# Altium PCB rasp_infrad.PcbDoc
Units mm, origin at the board's own origin, x right, y up, seen from the top; angles counter-clockwise.
Board outline 152.4 x 101.6 mm, 2 copper layers (Top Layer, Bottom Layer); 17 components, 15 nets, 53 pads, 6 vias.
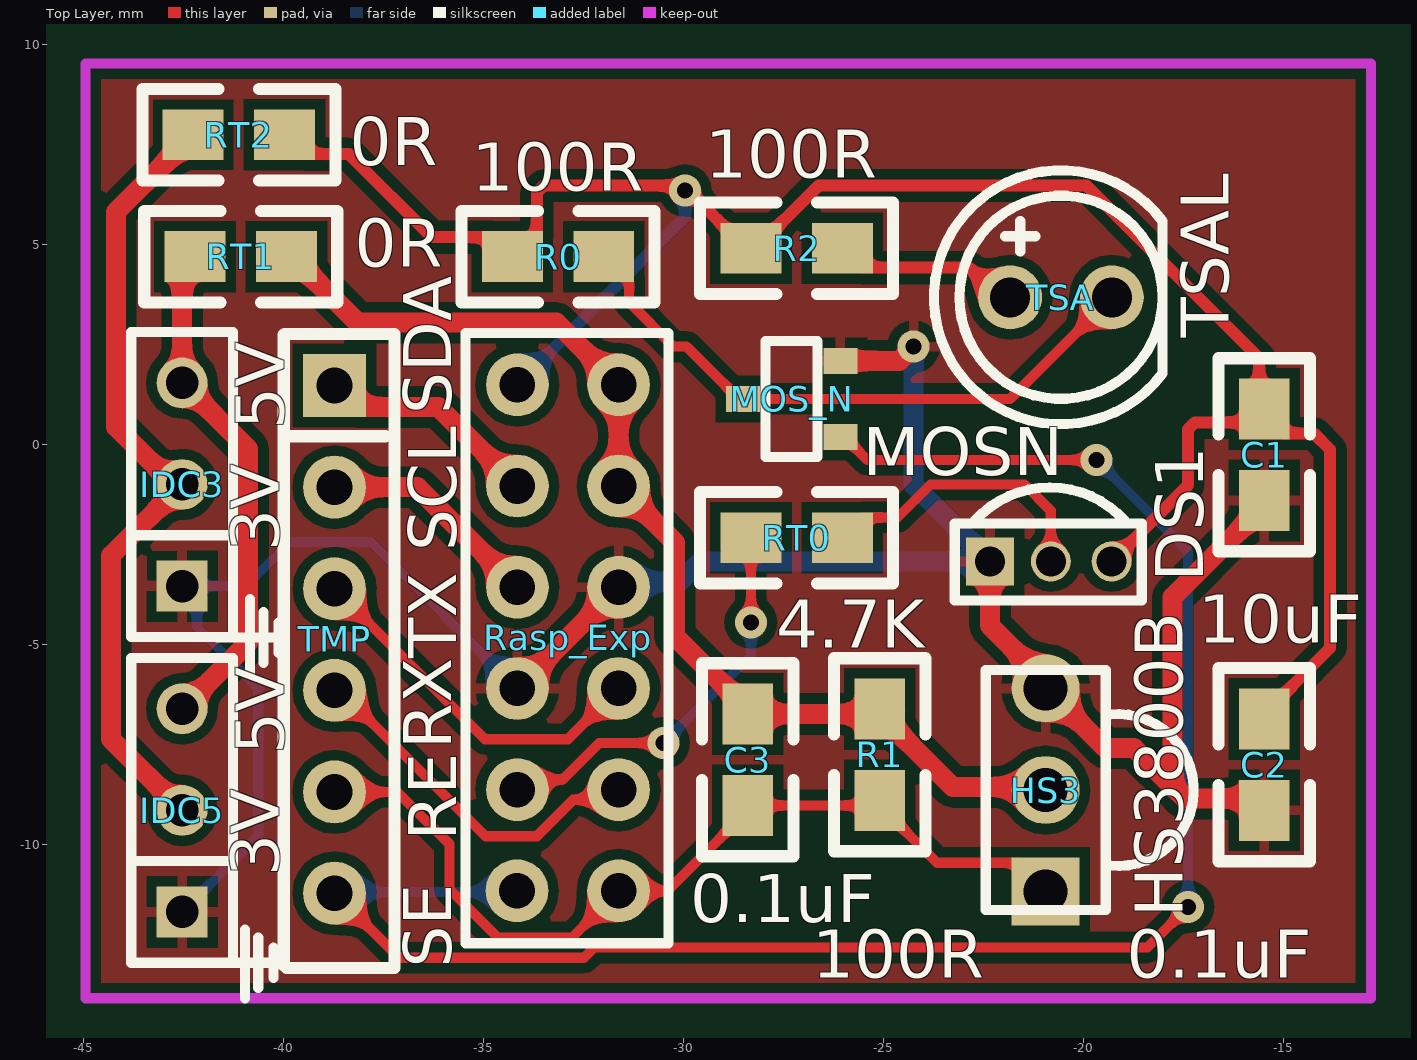
[diagram p0: Top Layer view]
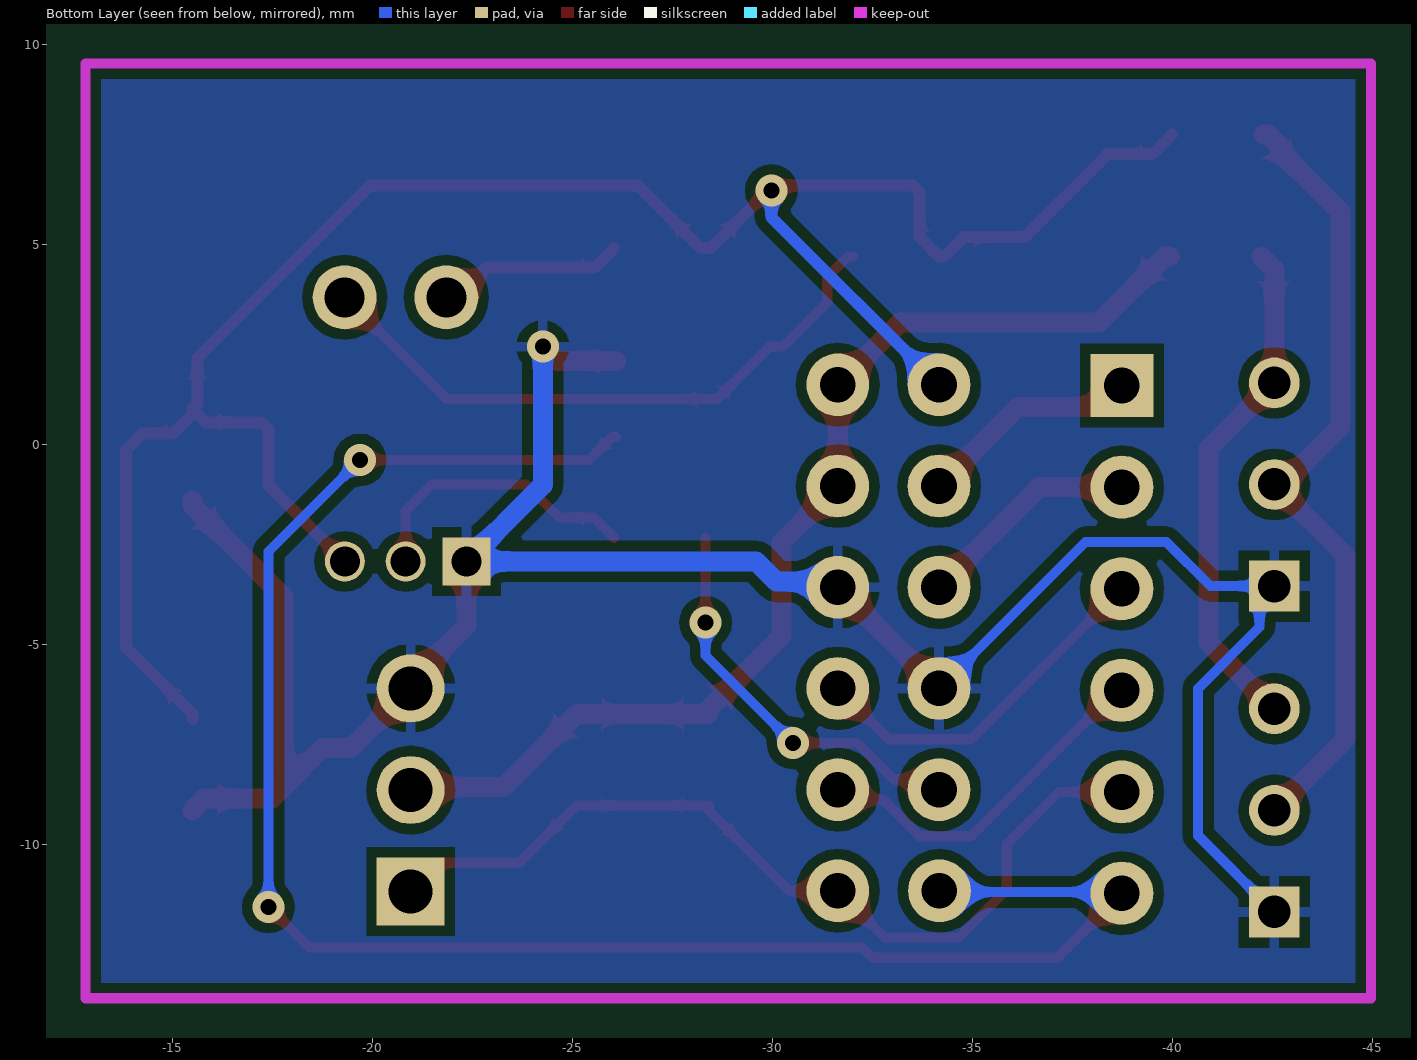
[diagram p1: Bottom Layer view, seen from below]

## Layer stack, top to bottom
Top Solder: solder mask 0.0102, Solder Resist, Dk 3.5
Top Layer: signal copper 0.0356
Dielectric1: dielectric 0.32, FR-4, Dk 4.8
Bottom Layer: signal copper 0.0356
Bottom Solder: solder mask 0.0102, Solder Resist, Dk 3.5

## Board outline
-85.354,-63.968 67.046,-63.968 67.046,37.632 -85.354,37.632

## Design rules (kind name [scope] priority, off if disabled: settings)
Clearance [All] p1: gap=0.254 ignorepadtopadclearanceinfootprint=FALSE except(0: Arc-Hole Track-Hole SMDPad-Hole THPad-Hole Via-Hole Fill-Hole Poly-Hole Region-Hole Text-Hole)
FabricationTestPointUsage TestPointUsage [All] p1: valid=0 allowmultiple=FALSE
FabricationTestpoint Testpoint [All] p1: side=3 testpointundercomponent=TRUE minsize=1.016 maxsize=2.54 preferedsize=1.524 minholesize=0 maxholesize=1.016 preferedholesize=0.813 testpointgrid=0.025 allowsidetop=TRUE allowsidebottom=TRUE usegrid=TRUE gridtolerance=0
HoleToHoleClearance [All] p1 off: gap=0.254 allowstackedmicrovias=TRUE
LayerPairs [All] p1 off: enforce=TRUE
MinimumSolderMaskSliver [All] p1 off: minsoldermaskwidth=0.254
PolygonConnect [All] p1: connectstyle=Relief reliefconductorwidth=0.254 reliefentries=4 polygonreliefangle="90 Angle" airgapwidth=0.254
RoutingVias [All] p1: holewidth=0.711 width=1.27 viastyle="Through Hole" minholewidth=0.711 minwidth=1.27 maxholewidth=0.711 maxwidth=1.27
SilkToSilkClearance [All] p1 off: silktosilkclearance=0.254
SilkToSolderMaskClearance SilkscreenOverComponentPads [IsPad] p1 off: minsilkscreentomaskgap=0.254 clearancetoexposedcopper=TRUE
SolderMaskExpansion [All] p1: expansion=0.102
Width [All] p1: maxlimit=0.5 minlimit=0.254 preferedwidth=0.254
23 further rules are at their usual default settings.

## Classes and differential pairs
component class rasp_infrad: C1 C2 C3 HS3 IDC3 MOS_N R0 R1 R2 Rasp_Exp RT0 RT1 RT2 TMP TSA

## Components (designator, comment, footprint, x,y, rotation, side; value= is the part's Value field where it differs from the comment)
C1 "10uF" 0805 -15.705,-0.386 r90 top
C2 "0.1uF" 0805 -15.705,-8.133 r90 top
C3 "0.1uF" 0805 -28.194,-7.747 r270 top
DS1 "DS1" DS18B20 -20.528,-2.796 r0 top
HS3 "HS3800B" HS0038B -20.663,-7.637 r270 top
IDC3 "IDC3" IDC3 -42.545,-0.997 r90 top
IDC5 "IDC5" IDC3 -42.545,-9.144 r90 top (schematic designator IDC3)
MOS_N "MOSN" MOSN -27.305,1.143 r90 top
R0 "100R" 0805 -33.279,4.91 r0 top
R1 "100R" 0805 -24.892,-7.62 r270 top
R2 "100R" 0805 -27.051,4.699 r180 top
Rasp_Exp "Rasp_Exp" Rasp_Exp -32.493,-3.066 r0 top
RT0 "4.7K" 0805 -27.051,-2.54 r180 top
RT1 "0R" 0805 -41.21,4.91 r0 top
RT2 "0R" 0805 -41.258,7.958 r0 top
TMP "IDC6" IDC6 -38.621,-4.784 r90 top
TSA "TSAL" TSAL6200 -20.421,1.74 r0 top

## Footprints (in the part's own frame and the unit in brackets; to place one, negate y for a bottom-side part, rotate by r counter-clockwise, add the part's x,y. Pads: shape width x height; smd on the part's side, far side on the other; paste and mask are expansions set on the pad)
0805 [mil]
  rect 60x50 smd: 1(50.2,-8.31) 2(-39.8,-8.31)
  silkscreen extent -90,-53 100,37
DS18B20 [mm]
  rect 1.2x1.2 hole 0.75: 1(-1.82,-0.125)
  round 1 hole 0.75: 2(-0.3,-0.125) 3(1.22,-0.125)
  silkscreen extent -2.7,-1.1 1.97,1.73
HS0038B [mm]
  rect 1.7x1.7 hole 1.1: 1(3.539,-0.292)
  round 1.7 hole 1.1: 2(0.999,-0.292) 3(-1.541,-0.292)
  silkscreen extent -2,-1.79 4,3.4
IDC3 [mil]
  rect 50x50 hole 32: 1(-100,0)
  round 50 hole 32: 2(0,0) 3(100,0)
  silkscreen extent -150,-50 150,50
IDC6 [mil]
  rect 62x62 hole 35.09: 1(246.5,4.49)
  round 62 hole 35.09: 2(146.5,4.49) 3(46.5,4.49) 4(-53.5,4.49) 5(-153.5,4.49) 6(-253.11,4.49)
  silkscreen extent -327,-55 297,54
MOSN [mm]
  rect 0.65x0.85 smd: 1(-0.95,-1.215) 2(0.95,-1.215) 3(0,1.221)
  silkscreen extent -1.45,-0.64 1.45,0.66
Rasp_Exp [mm]
  round 1.57 hole 0.89: 1(-1.67,4.56) 2(-1.67,2.03) 3(-1.67,-0.5) 4(-1.67,-3.03) 5(-1.67,-5.56) 6(-1.68,-8.09) 7(0.86,-8.09) 8(0.86,-5.56) 9(0.86,-3.03) 10(0.86,-0.5) 11(0.86,2.03) 12(0.86,4.56)
  silkscreen extent -2.97,-9.4 2.11,5.86
TSAL6200 [mm]
  round 1.6 hole 1: 1(-1.423,1.943) 2(1.117,1.943)
  silkscreen extent -3.32,-1.23 2.39,5.11

## Part data
C1 C2 C3: library part 普通电容, "Capacitor"
DS1: library part DS18B20, "数字温度传感器"
HS3: "红外接收管"
IDC3 IDC5: library part 三脚引线孔
MOS_N: library part MOS_N
R0 R1 R2 RT0 RT1 RT2: library part RES
TMP: library part 六脚引线孔
TSA: library part TSAL6200

## Via types
v1: diameter 0.8, hole 0.4, Top Layer to Bottom Layer, 6 vias

## Nets (pads, with @x,y where several pads share a name; then routed paths per layer and width w, separated by ;. In a path a pad name is that pad's centre, name@x,y a point inside that pad or via, vN(x,y) a via of type N, cw(c..) or ccw(c..) an arc to the next point about the centre after c; other vN are vias at no path point)
3.3V: C1.1 C2.1 DS1.3 R0.2 R2.1 Rasp_Exp.1 RT2.1 | length 53.8
  Top Layer w0.3: RT2.1 -39.498,7.262 -38.377,7.262 -36.299,5.184 -34.775,5.184 R0.2 -34.163,4.699 -33.678,5.184 -33.678,6.301 -33.502,6.477 -30.02,6.477 -28.453,4.91 R2.1 -28.199,4.91 -26.632,6.477 -19.939,6.477 -15.621,2.159 -15.621,1.016 C1.1 ; DS1.3 -17.399,-1.012 -17.399,0.381 -17.223,0.557 -15.826,0.557 C1.1 ; C2.1 -15.494,-6.731 -13.843,-5.08 -13.843,-0.127 -14.247,0.277 -15.009,0.277 -15.494,0.762 C1.1
  Bottom Layer w0.3: Rasp_Exp.1 -29.972,5.685 v1(-29.972,6.35)
5V: C3.2 HS3.2 R1.2 Rasp_Exp.11 Rasp_Exp.12 RT1.1 | length 27.4
  Top Layer w0.5: RT1.1 -39.808,4.699 -38.157,3.048 -33.187,3.048 Rasp_Exp.12 Rasp_Exp.11 -30.226,-2.443 -30.226,-4.788 -28.405,-6.609 C3.2 -25.103,-6.736 -23.279,-8.56 -21.031,-8.56 HS3.2
DATA: Rasp_Exp.5 RT0.1 | length 10.2
  Top Layer w0.254: Rasp_Exp.5 -33.911,-8.374 -33.03,-8.374 -32.116,-7.46 v1(-30.513,-7.46) ; v1(-28.326,-4.445) RT0.1 RT0.1@-28.321,-2.334
  Bottom Layer w0.254: v1(-30.513,-7.46) -28.326,-5.273 v1(-28.326,-4.445)
GND: C1.2 C2.2 DS1.1 HS3.3 IDC3.1 IDC5.1 MOS_N.2 Rasp_Exp.4 Rasp_Exp.10 | length 59.9
  Top Layer w0.5: Rasp_Exp.4 Rasp_Exp.10 ; MOS_N.2 -24.613,2.093 v1(-24.257,2.449) ; DS1.1 -22.348,-4.526 -20.955,-5.919 HS3.3 -19.464,-7.587 -18.749,-7.587 -17.78,-8.556 ; C2.2 -15.789,-8.849 -17.487,-8.849 -17.78,-8.556 ; C1.2 -15.494,-1.524 -17.78,-3.81 -17.78,-8.556
  Bottom Layer w0.254: IDC5.1 -40.64,-9.779 -40.64,-6.096 -42.174,-4.562 -42.174,-3.908 IDC3.1 -40.949,-3.537 -39.847,-2.435 -37.824,-2.435 Rasp_Exp.4
  Bottom Layer w0.5: Rasp_Exp.10 -31.495,-3.428 -30.098,-3.428 -29.591,-2.921 DS1.1 -24.257,-1.012 v1(-24.257,2.449)
NetDS1_2: DS1.2 RT0.2 | length 7.3
  Top Layer w0.254: RT0.2 -25.532,-1.821 -24.661,-1.821 -23.837,-0.997 -21.482,-0.997 -20.828,-1.651 DS1.2
NetIDC3_2: IDC3.2 IDC5.2 RT2.2 | length 20
  Top Layer w0.5: IDC5.2 -44.323,-7.366 -44.323,-2.775 IDC3.2 -42.753,-0.997 -44.196,0.446 -44.196,5.82 -42.781,7.235 -42.781,7.362 -42.396,7.747 RT2.2
NetIDC3_3: IDC3.3 IDC5.3 RT1.2 | length 12.8
  Top Layer w0.5: IDC5.3 -40.894,-4.953 -40.894,-0.108 IDC3.3 -42.545,4.375 RT1.2
NetR2_2: R2.2 TSA.1 | length 4.7
  Top Layer w0.3: R2.2 -25.555,4.425 -22.87,4.425 -22.128,3.683 TSA.1
RECV: C3.1 HS3.1 R1.1 Rasp_Exp.7 TMP.5 | length 22.3
  Top Layer w0.254: TMP.5 -37.164,-8.683 -35.857,-9.99 -35.857,-11.121 -34.656,-12.322 -32.799,-12.322 Rasp_Exp.7 -30.412,-11.156 -28.405,-9.149 C3.1 -25.103,-9.022 -23.672,-10.453 -21.678,-10.453 HS3.1
RX: Rasp_Exp.8 TMP.4 | length 9.1
  Top Layer w0.254: TMP.4 -38.609,-6.143 -34.96,-9.792 -33.68,-9.792 -32.766,-8.878 -31.885,-8.878 Rasp_Exp.8
SCL: Rasp_Exp.3 TMP.2 | length 5.6
  Top Layer w0.5: TMP.2 -36.666,-1.063 Rasp_Exp.3
SDA: Rasp_Exp.2 TMP.1 | length 5.6
  Top Layer w0.5: TMP.1 -38.198,0.939 -36.138,0.939 Rasp_Exp.2
SEND: MOS_N.3 R0.1 TSA.2 | length 15.6
  Top Layer w0.254: R0.1 -31.877,4.699 -31.369,4.191 -31.369,3.556 -30.262,2.449 -29.931,2.449 -28.626,1.143 MOS_N.3 -21.844,1.143 TSA.2
SENDC: MOS_N.1 Rasp_Exp.6 TMP.6 | length 45.8
  Top Layer w0.254: TMP.6 -37.118,-12.83 -32.499,-12.83 -32.242,-12.573 -18.415,-12.573 v1(-17.399,-11.557) ; MOS_N.1 -25.99,0.193 -25.414,-0.384 v1(-19.686,-0.384)
  Bottom Layer w0.254: TMP.6 -38.706,-11.185 -34.202,-11.185 Rasp_Exp.6 ; v1(-19.686,-0.384) -17.399,-2.671 v1@-17.399,-11.43
TX: Rasp_Exp.9 TMP.3 | length 9.2
  Top Layer w0.254: TMP.3 -34.972,-7.366 -32.903,-7.366 Rasp_Exp.9

## Polygon pours and split planes (outlines as drawn)
GND on Bottom Layer "GND_L02_P1016" (solid, remove dead copper, pour order 1016): -45.72,9.144
GND on Bottom Layer "GND_L02_P1014" (solid, remove dead copper, pour order 1014): -44.958,9.525 -12.827,9.525 -12.827,-13.843 -44.958,-13.843
GND on Bottom Layer "GND_L02_P1010" (solid, remove dead copper, pour order 1010): -29.337,-9.652
GND on Bottom Layer "GND_L02_P1008" (solid, remove dead copper, pour order 1008): -31.877,-10.16
GND on Top Layer "GND_L01_P1018" (solid, remove dead copper, pour order 1018): -44.958,9.525 -12.827,9.525 -12.827,-13.843 -44.958,-13.843

## Keep-outs
Keep-Out Layer:
  lines w0.254: -44.958,-13.843 -12.827,-13.843 -12.827,9.525 -44.958,9.525 -44.958,-13.843

## Silkscreen, mask and mechanical layers (free items; w line width, h text height)
Top Overlay:
  lines w0.254: -41.675,-4.826 -40.767,-4.826 -40.259,-4.826 ; -41.227,-12.954 -40.64,-12.954 ; -40.973,-13.843 -40.973,-12.954 -40.386,-12.954 ; -40.973,-13.081 -40.973,-12.122 ; -40.846,-5.715 -40.846,-4.756 ; -40.846,-4.826 -40.846,-3.867 ; -40.64,-13.589 -40.64,-12.319 ; -40.513,-5.461 -40.513,-4.191 ; -40.259,-13.335 -40.259,-12.573 ; -40.132,-5.207 -40.132,-4.445
  text "SDA" at -35.814,0.762 h1.2 r90
  text "5V" at -40.005,0.381 h1.2 r90
  text "3V" at -40.132,-2.667 h1.2 r90
  text "SCL" at -35.687,-2.667 h1.2 r90
  text "TX" at -35.687,-5.339 h1.2 r90
  text "RX" at -35.814,-7.62 h1.2 r90
  text "5V" at -40.005,-7.747 h1.2 r90
  text "RE" at -35.687,-9.906 h1.2 r90
  text "3V" at -40.132,-10.795 h1.2 r90
  text "SE" at -35.814,-13.083 h1.2 r90